# EAGLE board AutoSpielSimplified 2 (EAGLE 9.2.2)
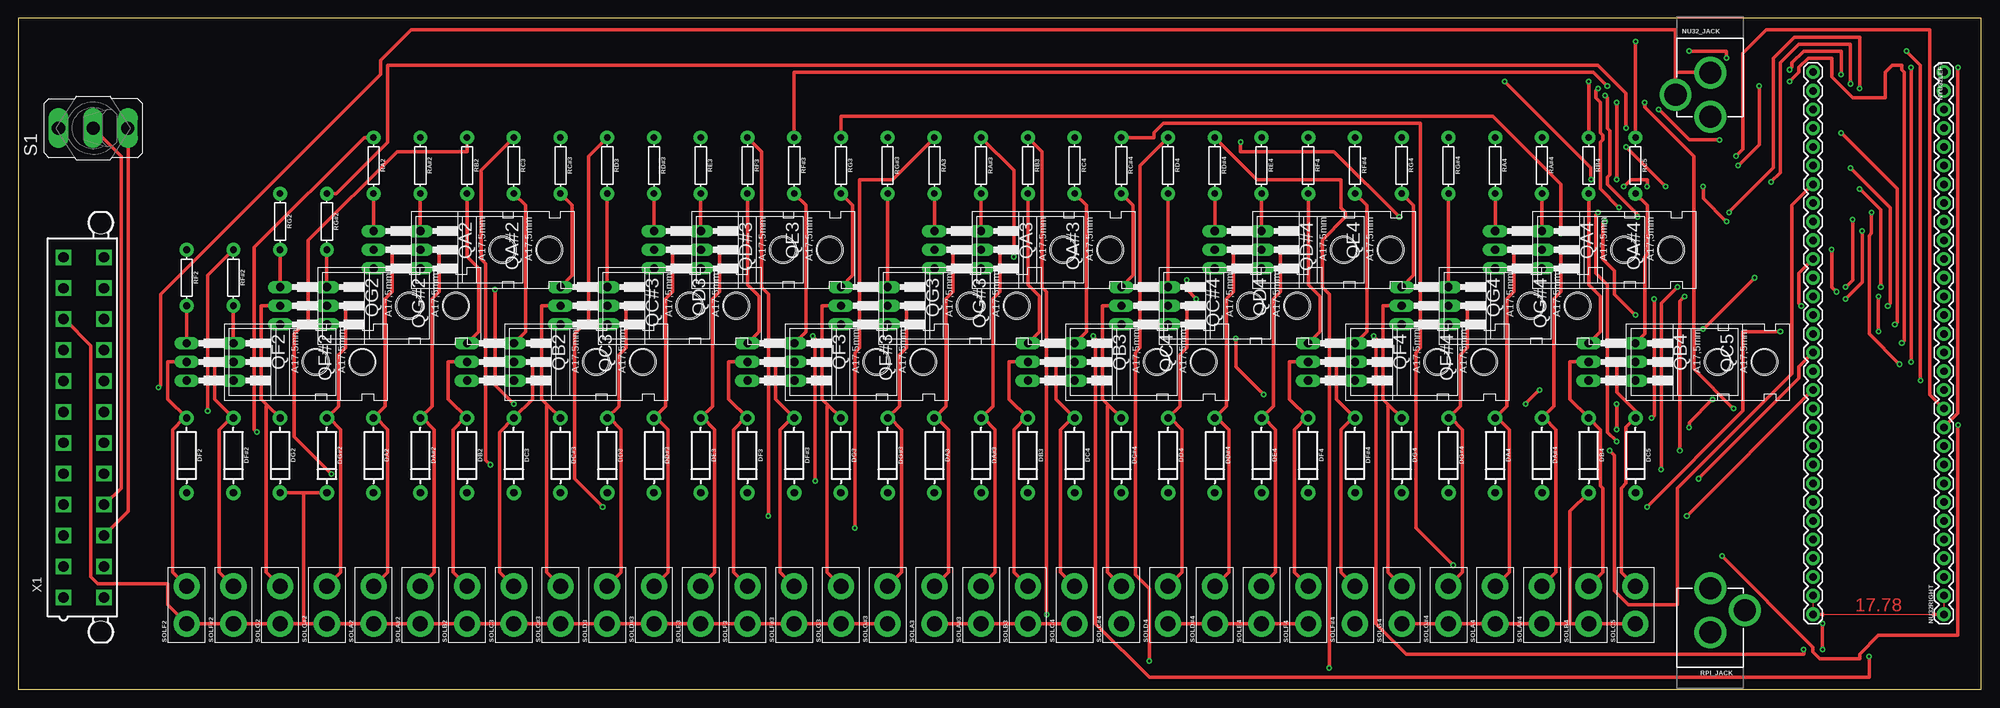
[diagram p0: board, top side]
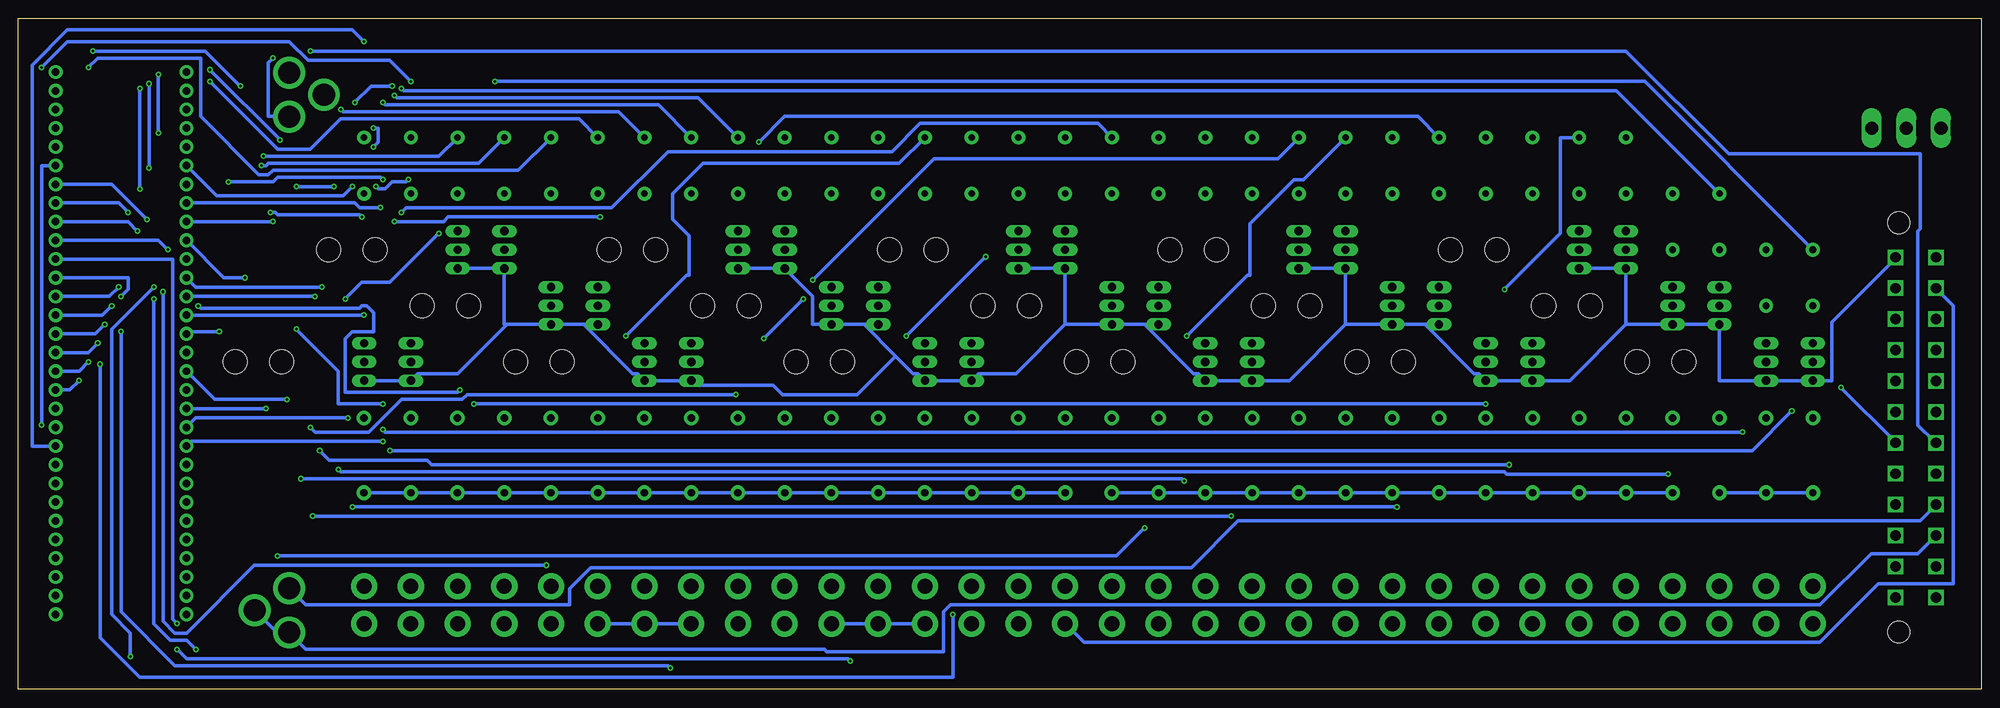
[diagram p1: board, bottom side, seen from below]

Size 266.68 x 91.11 mm. Coordinates in mm from the lower left corner, seen from the top.
Outline: 0,0 266.68,0 266.68,91.11 0,91.11 0,0
Copper layers (1*16): Top 0.035mm / dielectric 1.5mm / Bottom 0.035mm
Design rules "default *": minimum track width 20mil, minimum drill 0.35mm, track to track 16mil, track to pad 16mil, pad to pad 16mil, via to via 16mil, smd to smd 16mil, copper to edge 40mil, drill to drill 16mil, minimum pad ring 10mil, minimum via ring 8mil, stop-mask expansion 4mil, vias tented up to drill 0mil, thermal gap 10mil

## Footprints (pad centres in the part's own frame; a part is rotated, then mirrored left to right if it is on the bottom)
DIODE-1N4001 = drill 1 pad 1.981: A -5.08,0; C 5.08,0
POWER_JACK_PTH = drill 2.997 pad 4.318: GND 0,7.7; GNDBREAK 4.7,10.7; PWR 0,13.7
1X30 = drill 1.016 pad 1.88: 1 0,0; 2 2.54,0; 3 5.08,0; 4 7.62,0; 5 10.16,0; 6 12.7,0; 7 15.24,0; 8 17.78,0; 9 20.32,0; 10 22.86,0; 11 25.4,0; 12 27.94,0; 13 30.48,0; 14 33.02,0; 15 35.56,0; 16 38.1,0; 17 40.64,0; 18 43.18,0; 19 45.72,0; 20 48.26,0; 21 50.8,0; 22 53.34,0; 23 55.88,0; 24 58.42,0; 25 60.96,0; 26 63.5,0; 27 66.04,0; 28 68.58,0; 29 71.12,0; 30 73.66,0
TO220AH = drill 1.118 long: B -2.54,-6.35; C 0,-6.35; E 2.54,-6.35 | hole 3.302: 0,11.176
AXIAL-0.3 = drill 0.9 pad 1.88: P$1 -3.81,0; P$2 3.81,0
M9040P = drill 1.803 long: 1 0,4.699; 2 0,0; 3 0,-4.699
1X02_XTRA_BIG = drill 2.057 pad 3.556: 1 -2.54,0; 2 2.54,0
5566-24 = drill 1.4 square: 1 23.1,-2.75; 2 18.9,-2.75; 3 14.7,-2.75; 4 10.5,-2.75; 5 6.3,-2.75; 6 2.1,-2.75; 7 -2.1,-2.75; 8 -6.3,-2.75; 9 -10.5,-2.75; 10 -14.7,-2.75; 11 -18.9,-2.75; 12 -23.1,-2.75; 13 23.1,2.75; 14 18.9,2.75; 15 14.7,2.75; 16 10.5,2.75; 17 6.3,2.75; 18 2.1,2.75; 19 -2.1,2.75; 20 -6.3,2.75; 21 -10.5,2.75; 22 -14.7,2.75; 23 -18.9,2.75; 24 -23.1,2.75 | hole 3: 27.8,2.29; -27.8,2.29

## Placement (x,y rotation side)
DA2  1A/50V/1.1V  [DIODE-1N4001]  48.26,31.75 270 top
DA3  1A/50V/1.1V  [DIODE-1N4001]  124.46,31.75 270 top
DA4  1A/50V/1.1V  [DIODE-1N4001]  200.66,31.75 270 top
DA#2  1A/50V/1.1V  [DIODE-1N4001]  54.61,31.75 270 top
DA#3  1A/50V/1.1V  [DIODE-1N4001]  130.81,31.75 270 top
DA#4  1A/50V/1.1V  [DIODE-1N4001]  207.01,31.75 270 top
DB2  1A/50V/1.1V  [DIODE-1N4001]  60.96,31.75 270 top
DB3  1A/50V/1.1V  [DIODE-1N4001]  137.16,31.75 270 top
DB4  1A/50V/1.1V  [DIODE-1N4001]  213.36,31.75 270 top
DC3  1A/50V/1.1V  [DIODE-1N4001]  67.31,31.75 270 top
DC4  1A/50V/1.1V  [DIODE-1N4001]  143.51,31.75 270 top
DC5  1A/50V/1.1V  [DIODE-1N4001]  219.71,31.75 270 top
DC#3  1A/50V/1.1V  [DIODE-1N4001]  73.66,31.75 270 top
DC#4  1A/50V/1.1V  [DIODE-1N4001]  149.86,31.75 270 top
DD3  1A/50V/1.1V  [DIODE-1N4001]  80.01,31.75 270 top
DD4  1A/50V/1.1V  [DIODE-1N4001]  156.21,31.75 270 top
DD#3  1A/50V/1.1V  [DIODE-1N4001]  86.36,31.75 270 top
DD#4  1A/50V/1.1V  [DIODE-1N4001]  162.56,31.75 270 top
DE3  1A/50V/1.1V  [DIODE-1N4001]  92.71,31.75 270 top
DE4  1A/50V/1.1V  [DIODE-1N4001]  168.91,31.75 270 top
DF2  1A/50V/1.1V  [DIODE-1N4001]  22.86,31.75 270 top
DF3  1A/50V/1.1V  [DIODE-1N4001]  99.06,31.75 270 top
DF4  1A/50V/1.1V  [DIODE-1N4001]  175.26,31.75 270 top
DF#2  1A/50V/1.1V  [DIODE-1N4001]  29.21,31.75 270 top
DF#3  1A/50V/1.1V  [DIODE-1N4001]  105.41,31.75 270 top
DF#4  1A/50V/1.1V  [DIODE-1N4001]  181.61,31.75 270 top
DG2  1A/50V/1.1V  [DIODE-1N4001]  35.56,31.75 270 top
DG3  1A/50V/1.1V  [DIODE-1N4001]  111.76,31.75 270 top
DG4  1A/50V/1.1V  [DIODE-1N4001]  187.96,31.75 270 top
DG#2  1A/50V/1.1V  [DIODE-1N4001]  41.91,31.75 270 top
DG#3  1A/50V/1.1V  [DIODE-1N4001]  118.11,31.75 270 top
DG#4  1A/50V/1.1V  [DIODE-1N4001]  194.31,31.75 270 top
NU32_JACK  POWER_JACK  [POWER_JACK_PTH]  229.87,91.44 180 top
NU32RIGHT  [1X30]  261.62,10.16 90 top
NYU32LEFT  [1X30]  243.84,10.16 90 top
QA2  TIP120  [TO220AH]  54.61,59.69 270 top
QA3  TIP120  [TO220AH]  130.81,59.69 270 top
QA4  TIP120  [TO220AH]  207.01,59.69 270 top
QA#2  TIP120  [TO220AH]  60.96,59.69 270 top
QA#3  TIP120  [TO220AH]  137.16,59.69 270 top
QA#4  TIP120  [TO220AH]  213.36,59.69 270 top
QB2  TIP120  [TO220AH]  67.31,44.45 270 top
QB3  TIP120  [TO220AH]  143.51,44.45 270 top
QB4  TIP120  [TO220AH]  219.71,44.45 270 top
QC3  TIP120  [TO220AH]  73.66,44.45 270 top
QC4  TIP120  [TO220AH]  149.86,44.45 270 top
QC5  TIP120  [TO220AH]  226.06,44.45 270 top
QC#3  TIP120  [TO220AH]  80.01,52.07 270 top
QC#4  TIP120  [TO220AH]  156.21,52.07 270 top
QD3  TIP120  [TO220AH]  86.36,52.07 270 top
QD4  TIP120  [TO220AH]  162.56,52.07 270 top
QD#3  TIP120  [TO220AH]  92.71,59.69 270 top
QD#4  TIP120  [TO220AH]  168.91,59.69 270 top
QE3  TIP120  [TO220AH]  99.06,59.69 270 top
QE4  TIP120  [TO220AH]  175.26,59.69 270 top
QF2  TIP120  [TO220AH]  29.21,44.45 270 top
QF3  TIP120  [TO220AH]  105.41,44.45 270 top
QF4  TIP120  [TO220AH]  181.61,44.45 270 top
QF#2  TIP120  [TO220AH]  35.56,44.45 270 top
QF#3  TIP120  [TO220AH]  111.76,44.45 270 top
QF#4  TIP120  [TO220AH]  187.96,44.45 270 top
QG2  TIP120  [TO220AH]  41.91,52.07 270 top
QG3  TIP120  [TO220AH]  118.11,52.07 270 top
QG4  TIP120  [TO220AH]  194.31,52.07 270 top
QG#2  TIP120  [TO220AH]  48.26,52.07 270 top
QG#3  TIP120  [TO220AH]  124.46,52.07 270 top
QG#4  TIP120  [TO220AH]  200.66,52.07 270 top
RA2  1k  [AXIAL-0.3]  48.26,71.12 270 top
RA3  1k  [AXIAL-0.3]  124.46,71.12 270 top
RA4  1k  [AXIAL-0.3]  200.66,71.12 270 top
RA#2  1k  [AXIAL-0.3]  54.61,71.12 270 top
RA#3  1k  [AXIAL-0.3]  130.81,71.12 270 top
RA#4  1k  [AXIAL-0.3]  207.01,71.12 270 top
RB2  1k  [AXIAL-0.3]  60.96,71.12 270 top
RB3  1k  [AXIAL-0.3]  137.16,71.12 270 top
RB4  1k  [AXIAL-0.3]  213.36,71.12 270 top
RC3  1k  [AXIAL-0.3]  67.31,71.12 270 top
RC4  1k  [AXIAL-0.3]  143.51,71.12 270 top
RC5  1k  [AXIAL-0.3]  219.71,71.12 270 top
RC#3  1k  [AXIAL-0.3]  73.66,71.12 270 top
RC#4  1k  [AXIAL-0.3]  149.86,71.12 270 top
RD3  1k  [AXIAL-0.3]  80.01,71.12 270 top
RD4  1k  [AXIAL-0.3]  156.21,71.12 270 top
RD#3  1k  [AXIAL-0.3]  86.36,71.12 270 top
RD#4  1k  [AXIAL-0.3]  162.56,71.12 270 top
RE3  1k  [AXIAL-0.3]  92.71,71.12 270 top
RE4  1k  [AXIAL-0.3]  168.91,71.12 270 top
RF2  1k  [AXIAL-0.3]  22.86,55.88 270 top
RF3  1k  [AXIAL-0.3]  99.06,71.12 270 top
RF4  1k  [AXIAL-0.3]  175.26,71.12 270 top
RF#2  1k  [AXIAL-0.3]  29.21,55.88 270 top
RF#3  1k  [AXIAL-0.3]  105.41,71.12 270 top
RF#4  1k  [AXIAL-0.3]  181.61,71.12 270 top
RG2  1k  [AXIAL-0.3]  35.56,63.5 270 top
RG3  1k  [AXIAL-0.3]  111.76,71.12 270 top
RG4  1k  [AXIAL-0.3]  187.96,71.12 270 top
RG#2  1k  [AXIAL-0.3]  41.91,63.5 270 top
RG#3  1k  [AXIAL-0.3]  118.11,71.12 270 top
RG#4  1k  [AXIAL-0.3]  194.31,71.12 270 top
RPI_JACK  POWER_JACK  [POWER_JACK_PTH]  229.87,0 0 top
S1  [M9040P]  10.16,76.2 90 top
SOLA2  [1X02_XTRA_BIG]  48.26,11.43 90 top
SOLA3  [1X02_XTRA_BIG]  124.46,11.43 90 top
SOLA4  [1X02_XTRA_BIG]  200.66,11.43 90 top
SOLA#2  [1X02_XTRA_BIG]  54.61,11.43 90 top
SOLA#3  [1X02_XTRA_BIG]  130.81,11.43 90 top
SOLA#4  [1X02_XTRA_BIG]  207.01,11.43 90 top
SOLB2  [1X02_XTRA_BIG]  60.96,11.43 90 top
SOLB3  [1X02_XTRA_BIG]  137.16,11.43 90 top
SOLB4  [1X02_XTRA_BIG]  213.36,11.43 90 top
SOLC3  [1X02_XTRA_BIG]  67.31,11.43 90 top
SOLC4  [1X02_XTRA_BIG]  143.51,11.43 90 top
SOLC5  [1X02_XTRA_BIG]  219.71,11.43 90 top
SOLC#3  [1X02_XTRA_BIG]  73.66,11.43 90 top
SOLC#4  [1X02_XTRA_BIG]  149.86,11.43 90 top
SOLD3  [1X02_XTRA_BIG]  80.01,11.43 90 top
SOLD4  [1X02_XTRA_BIG]  156.21,11.43 90 top
SOLD#3  [1X02_XTRA_BIG]  86.36,11.43 90 top
SOLD#4  [1X02_XTRA_BIG]  162.56,11.43 90 top
SOLE3  [1X02_XTRA_BIG]  92.71,11.43 90 top
SOLE4  [1X02_XTRA_BIG]  168.91,11.43 90 top
SOLF2  [1X02_XTRA_BIG]  22.86,11.43 90 top
SOLF3  [1X02_XTRA_BIG]  99.06,11.43 90 top
SOLF4  [1X02_XTRA_BIG]  175.26,11.43 90 top
SOLF#2  [1X02_XTRA_BIG]  29.21,11.43 90 top
SOLF#3  [1X02_XTRA_BIG]  105.41,11.43 90 top
SOLF#4  [1X02_XTRA_BIG]  181.61,11.43 90 top
SOLG2  [1X02_XTRA_BIG]  35.56,11.43 90 top
SOLG3  [1X02_XTRA_BIG]  111.76,11.43 90 top
SOLG4  [1X02_XTRA_BIG]  187.96,11.43 90 top
SOLG#2  [1X02_XTRA_BIG]  41.91,11.43 90 top
SOLG#3  [1X02_XTRA_BIG]  118.11,11.43 90 top
SOLG#4  [1X02_XTRA_BIG]  194.31,11.43 90 top
X1  5566-24  [5566-24]  8.89,35.56 270 top

## Library data of the parts
DA2-DA4 DA#2-DA#4 DB2-DB4 DC3-DC5 DC#3 DC#4 DD3 DD4 DD#3 DD#4 DE3 DE4 DF2-DF4 DF#2-DF#4 DG2-DG4 DG#2-DG#4 = SparkFun-DiscreteSemi; PROD_ID: DIO-09176
NU32_JACK RPI_JACK = SparkFun-Connectors; PROD_ID: CONN-08197
NU32RIGHT NYU32LEFT SOLA2-SOLA4 SOLA#2-SOLA#4 SOLB2-SOLB4 SOLC3-SOLC5 SOLC#3 SOLC#4 SOLD3 SOLD4 SOLD#3 SOLD#4 SOLE3 SOLE4 SOLF2-SOLF4 SOLF#2-SOLF#4 SOLG2-SOLG4 SOLG#2-SOLG#4 = SparkFun-Connectors
QA2-QA4 QA#2-QA#4 QB2-QB4 QC3-QC5 QC#3 QC#4 QD3 QD4 QD#3 QD#4 QE3 QE4 QF2-QF4 QF#2-QF#4 QG2-QG4 QG#2-QG#4 = transistor-power
RA2-RA4 RA#2-RA#4 RB2-RB4 RC3-RC5 RC#3 RC#4 RD3 RD4 RD#3 RD#4 RE3 RE4 RF2-RF4 RF#2-RF#4 RG2-RG4 RG#2-RG#4 = SparkFun-Resistors; PROD_ID: RES-08380
S1 = switch
X1 = con-molex; MF: MOLEX; OC_FARNELL: unknown; OC_NEWARK: unknown

## Nets
A2: NYU32LEFT.21 RA2.P$1
A3: NU32RIGHT.25 RA3.P$1
A4: NU32RIGHT.13 RA4.P$1
A#2: NYU32LEFT.20 RA#2.P$1
A#3: NU32RIGHT.24 RA#3.P$1
A#4: NU32RIGHT.12 RA#4.P$1
B2: NYU32LEFT.19 RB2.P$1
B3: NU32RIGHT.23 RB3.P$1
B4: NU32RIGHT.11 RB4.P$1
C3: NYU32LEFT.18 RC3.P$1
C4: NU32RIGHT.22 RC4.P$1
C5: NU32RIGHT.10 RC5.P$1
C#3: NYU32LEFT.17 RC#3.P$1
C#4: NU32RIGHT.21 RC#4.P$1
D3: NYU32LEFT.16 RD3.P$1
D4: NU32RIGHT.20 RD4.P$1
D#3: NYU32LEFT.15 RD#3.P$1
D#4: NU32RIGHT.19 RD#4.P$1
E3: NYU32LEFT.14 RE3.P$1
E4: NU32RIGHT.18 RE4.P$1
F2: NYU32LEFT.25 RF2.P$1
F3: NYU32LEFT.13 RF3.P$1
F4: NU32RIGHT.17 RF4.P$1
F#2: NYU32LEFT.24 RF#2.P$1
F#3: NYU32LEFT.12 RF#3.P$1
F#4: NU32RIGHT.16 RF#4.P$1
G2: NYU32LEFT.23 RG2.P$1
G3: NYU32LEFT.11 RG3.P$1
G4: NU32RIGHT.15 RG4.P$1
G#2: NYU32LEFT.22 RG#2.P$1
G#3: NYU32LEFT.10 RG#3.P$1
G#4: NU32RIGHT.14 RG#4.P$1
GND: QA2.E QA3.E QA4.E QA#2.E QA#3.E QA#4.E QB2.E QB3.E QB4.E QC3.E QC4.E QC5.E QC#3.E QC#4.E QD3.E QD4.E QD#3.E QD#4.E QE3.E QE4.E QF2.E QF3.E QF4.E QF#2.E QF#3.E QF#4.E QG2.E QG3.E QG4.E QG#2.E QG#3.E QG#4.E X1.24
N$1: QF2.B RF2.P$2
N$2: QC#3.B RC#3.P$2
N$3: DF2.A QF2.C SOLF2.2
N$4: QF#2.B RF#2.P$2
N$5: DF#2.A QF#2.C SOLF#2.2
N$6: DC#3.A QC#3.C SOLC#3.2
N$7: QG2.B RG2.P$2
N$8: DG2.A QG2.C SOLG2.2
N$9: QD3.B RD3.P$2
N$10: QG#2.B RG#2.P$2
N$11: DG#2.A QG#2.C SOLG#2.2
N$12: DD3.A QD3.C SOLD3.2
N$13: QA2.B RA2.P$2
N$14: DA2.A QA2.C SOLA2.2
N$15: QD#3.B RD#3.P$2
N$16: QA#2.B RA#2.P$2
N$17: DA#2.A QA#2.C SOLA#2.2
N$18: DD#3.A QD#3.C SOLD#3.2
N$19: QB2.B RB2.P$2
N$20: DB2.A QB2.C SOLB2.2
N$21: QE3.B RE3.P$2
N$22: QC3.B RC3.P$2
N$23: DC3.A QC3.C SOLC3.2
N$24: DE3.A QE3.C SOLE3.2
N$25: QA3.B RA3.P$2
N$26: DA3.A QA3.C SOLA3.2
N$27: QF3.B RF3.P$2
N$28: DF3.A QF3.C SOLF3.2
N$29: QF#3.B RF#3.P$2
N$30: DF#3.A QF#3.C SOLF#3.2
N$31: QG3.B RG3.P$2
N$32: DG3.A QG3.C SOLG3.2
N$33: QG#3.B RG#3.P$2
N$34: DG#3.A QG#3.C SOLG#3.2
N$35: QF4.B RF4.P$2
N$36: DF4.A QF4.C SOLF4.2
N$37: QF#4.B RF#4.P$2
N$38: DF#4.A QF#4.C SOLF#4.2
N$39: QG4.B RG4.P$2
N$40: DG4.A QG4.C SOLG4.2
N$41: QG#4.B RG#4.P$2
N$42: DG#4.A QG#4.C SOLG#4.2
N$43: QA4.B RA4.P$2
N$44: DA4.A QA4.C SOLA4.2
N$45: QA#4.B RA#4.P$2
N$46: DA#4.A QA#4.C SOLA#4.2
N$47: QB4.B RB4.P$2
N$48: DB4.A QB4.C SOLB4.2
N$49: QC5.B RC5.P$2
N$50: DC5.A QC5.C SOLC5.2
N$52: QA#3.B RA#3.P$2
N$53: DA#3.A QA#3.C SOLA#3.2
N$55: QB3.B RB3.P$2
N$56: DB3.A QB3.C SOLB3.2
N$57: S1.1
N$58: QC4.B RC4.P$2
N$59: DC4.A QC4.C SOLC4.2
N$61: QC#4.B RC#4.P$2
N$62: DC#4.A QC#4.C SOLC#4.2
N$64: QD4.B RD4.P$2
N$65: DD4.A QD4.C SOLD4.2
N$67: QD#4.B RD#4.P$2
N$68: DD#4.A QD#4.C SOLD#4.2
N$70: QE4.B RE4.P$2
N$71: DE4.A QE4.C SOLE4.2
NU32GND: NU32_JACK.GND NU32_JACK.GNDBREAK X1.18
NU32PWR: NU32_JACK.PWR X1.6
PS_ON: S1.2 X1.16
PS_ONGND: S1.3 X1.15
RPI_GND: RPI_JACK.GND RPI_JACK.GNDBREAK X1.3
RPI_PWR: RPI_JACK.PWR X1.4
VDD1: DA2.C DA#2.C DB2.C DC3.C DC#3.C DD3.C DD#3.C DE3.C DF2.C DF3.C DF#2.C DF#3.C DG2.C DG3.C DG#2.C DG#3.C SOLA2.1 SOLA#2.1 SOLB2.1 SOLC3.1 SOLC#3.1 SOLD3.1 SOLD#3.1 SOLE3.1 SOLF2.1 SOLF3.1 SOLF#2.1 SOLF#3.1 SOLG2.1 SOLG3.1 SOLG#2.1 SOLG#3.1 X1.10
VDD2: DA3.C DA4.C DA#3.C DA#4.C DB3.C DB4.C DC4.C DC5.C DC#4.C DD4.C DD#4.C DE4.C DF4.C DF#4.C DG4.C DG#4.C SOLA3.1 SOLA4.1 SOLA#3.1 SOLA#4.1 SOLB3.1 SOLB4.1 SOLC4.1 SOLC5.1 SOLC#4.1 SOLD4.1 SOLD#4.1 SOLE4.1 SOLF4.1 SOLF#4.1 SOLG4.1 SOLG#4.1 X1.11

## Tracks (layer width: path | path; a pad name or v marks a point on that pad's centre or on a via)
A2  (via drill 0.35)
  Top 0.508: v228.92,48.9 v235.9,55.88 | v217.17,35.24 v217.17,38.73 | v32.38,34.93 32.07,35.24 32.07,60.01 46.99,74.93 RA2.P$1
  Bottom 0.508: NYU32LEFT.21 238.76,55.88 v235.9,55.88 | v228.92,48.9 223.2,43.18 223.2,38.73 v217.17,38.73 | v217.17,35.24 216.85,34.93 v32.38,34.93
A3  (via drill 0.35)
  Top 0.508: RA3.P$1 118.75,69.22 114.3,69.22 114.3,46.35 113.67,45.72 v113.67,21.91 | v231.46,18.1 243.84,5.71 243.84,5.08 244.79,4.13 250.19,4.13 250.19,4.76 252.73,7.3 263.52,7.3 v263.52,35.88
  Bottom 0.508: v113.67,21.91 117.47,18.1 v231.46,18.1 | v263.52,35.88 263.52,71.12 NU32RIGHT.25
A4  (via drill 0.35)
  Top 0.508: v233.68,71.12 236.54,73.98 v236.54,81.91 | v256.54,86.68 258.44,84.77 v258.44,41.91
  Bottom 0.508: RA4.P$1 204.15,71.44 232.73,71.44 233.04,71.12 v233.68,71.12 | v236.54,81.91 241.3,86.68 v256.54,86.68 | v258.44,41.91 259.71,40.64 NU32RIGHT.13
A#2  (via drill 0.35)
  Top 0.508: NYU32LEFT.20 241.94,56.51 241.94,52.39 v242.25,52.07 | v204.79,38.73 v206.69,40.64 | v67.31,38.73 64.77,41.27 v64.77,54.29
  Bottom 0.508: v242.25,52.07 241.94,51.75 220.34,51.75 220.03,52.07 219.39,52.07 218.44,51.12 218.44,48.58 221.3,48.58 222.25,47.62 222.25,40.32 207.01,40.32 v206.69,40.64 | v67.31,38.73 v204.79,38.73 | v64.77,54.29 57.15,61.91 57.15,74.93 RA#2.P$1
A#3  (via drill 0.35)
  Top 0.508: RA#3.P$1 135.25,70.48 v135.25,58.74 | v146.05,47.94 146.37,47.62 146.37,8.89 153.67,1.59 251.46,1.59 v251.46,4.45 | v248.28,54.61 249.24,55.56 v249.24,63.82
  Bottom 0.508: v146.05,47.94 v135.25,58.74 | v251.46,4.45 251.46,7.62 254,10.16 254,48.9 v248.28,54.61 | v249.24,63.82 254,68.58 NU32RIGHT.24
A#4  (via drill 0.35)
  Top 0.508: v233.36,72.39 234.31,73.34 234.31,86.36 237.49,89.53 259.71,89.53 259.71,40.01 NU32RIGHT.12
  Bottom 0.508: RA#4.P$1 209.55,72.39 v233.36,72.39
B2  (via drill 0.35)
  Top 0.508: v225.43,54.61 223.2,52.39 v223.2,29.85 | v42.55,29.21 37.47,34.29 37.47,48.26 39.37,50.16 39.37,60.96 51.44,73.03 60.96,73.03 RB2.P$1
  Bottom 0.508: NYU32LEFT.19 242.57,54.61 v225.43,54.61 | v223.2,29.85 222.88,29.53 64.77,29.53 64.45,29.21 v42.55,29.21
B3  (via drill 0.35)
  Top 0.508: RB3.P$1 139.06,73.03 139.06,54.61 139.7,53.98 v139.7,10.16 | v255.59,44.13 251.46,48.26 251.46,61.6 251.78,61.91 v251.78,64.77
  Bottom 0.508: v139.7,10.16 139.7,1.59 250.19,1.59 255.59,6.98 v255.59,44.13 | v251.78,64.77 253.05,66.04 NU32RIGHT.23
B4  (via drill 0.35)
  Top 0.508: v213.36,82.55 RB4.P$1 | v263.52,84.45 263.52,37.46 NU32RIGHT.11
  Bottom 0.508: v213.36,82.55 216.22,85.41 227.33,85.41 229.87,87.95 260.03,87.95 v263.52,84.45
C3  (via drill 0.35)
  Top 0.508: v226.38,53.34 225.74,52.71 v225.74,32.38 | v64.14,30.48 63.5,31.12 63.5,57.79 62.87,58.42 62.87,70.48 RC3.P$1
  Bottom 0.508: v226.38,53.34 NYU32LEFT.18 | v225.74,32.38 224.47,31.12 211.14,31.12 210.5,30.48 v64.14,30.48
C4  (via drill 0.35)
  Top 0.508: v184.15,47.94 184.47,47.62 184.47,8.89 188.59,4.76 242.57,4.76 v242.57,5.4 | v248.28,53.02 250.51,55.24 v250.51,62.23
  Bottom 0.508: RC4.P$1 147,71.44 173.67,71.44 177.8,67.31 177.8,63.82 175.58,61.6 175.58,56.2 175.9,56.2 v184.15,47.94 | v242.57,5.4 243.84,6.67 246.06,6.67 248.28,8.89 v248.28,53.02 | v250.51,62.23 251.78,63.5 NU32RIGHT.22
C5  (via drill 0.35)
  Top 0.508: v219.71,87.95 RC5.P$1
  Bottom 0.508: v219.71,87.95 221.3,89.53 260.03,89.53 264.8,84.77 264.8,33.02 NU32RIGHT.10
C#3  (via drill 0.35)
  Top 0.508: v219.71,50.8 216.85,53.66 216.85,56.83 215.26,58.42 215.26,63.18 v215.58,63.5 | v187.64,64.13 178.75,73.03 166.05,73.03 v166.05,74.29
  Bottom 0.508: v219.71,50.8 NYU32LEFT.17 | v215.58,63.5 208.91,63.5 208.28,64.13 v187.64,64.13 | v166.05,74.29 162.56,77.79 76.52,77.79 RC#3.P$1
C#4  (via drill 0.35)
  Top 0.508: RC#4.P$1 154.31,74.93 154.31,75.56 155.57,76.83 190.5,76.83 190.5,46.35 189.87,45.72 189.87,21.91 v194.94,16.83 | v247.01,53.98 246.38,54.61 v246.38,59.69
  Bottom 0.508: v194.94,16.83 234.63,16.83 243.84,7.62 245.43,7.62 247.01,9.21 v247.01,53.98 | v246.38,59.69 247.65,60.96 NU32RIGHT.21
D3  (via drill 0.35)
  Top 0.508: v239.4,48.58 234.31,48.58 234.31,37.78 v221.3,24.76 | v79.38,24.76 75.56,28.57 75.56,48.26 77.47,50.16 77.47,72.39 RD3.P$1
  Bottom 0.508: NYU32LEFT.16 243.52,48.58 v239.4,48.58 | v79.38,24.76 v221.3,24.76
D4  (via drill 0.35)
  Top 0.508: RD4.P$1 152.4,71.12 152.4,46.35 151.76,45.72 151.76,15.56 153.67,13.65 v153.67,3.81 | v245.11,8.89 v245.11,5.4
  Bottom 0.508: v153.67,3.81 153.99,4.13 243.84,4.13 v245.11,5.4 | v245.11,8.89 245.75,9.52 245.75,58.42 NU32RIGHT.20
D#3  (via drill 0.35)
  Top 0.508: v107.95,47.94 108.27,47.62 v108.27,28.26 | v228.28,28.57 241.94,42.23 241.94,43.82 NYU32LEFT.15
  Bottom 0.508: RD#3.P$1 92.08,69.22 93.34,69.22 99.38,63.18 99.38,56.2 99.69,56.2 v107.95,47.94 | v108.27,28.26 108.58,28.57 v228.28,28.57
D#4  (via drill 0.35)
  Top 0.508: RD#4.P$1 168.28,69.22 179.71,69.22 179.71,65.41 180.34,64.77 180.34,64.13 177.16,60.96 177.16,54.61 178.12,53.66 v178.12,2.86 | v252.73,53.34 v252.73,48.58
  Bottom 0.508: v178.12,2.86 178.44,3.18 245.43,3.18 252.73,10.48 v252.73,48.58 | v252.73,53.34 251.78,54.29 251.78,55.88 NU32RIGHT.19
E3  (via drill 0.35)
  Top 0.508: v230.19,39.37 227.01,36.2 v227.01,35.56 | v169.23,40.01 165.42,43.82 v165.42,47.62 | v160.02,53.02 158.75,54.29 v158.75,55.56
  Bottom 0.508: NYU32LEFT.14 240.03,39.37 v230.19,39.37 | v227.01,35.56 226.38,34.93 219.07,34.93 214.63,39.37 206.38,39.37 205.74,40.01 v169.23,40.01 | v160.02,53.02 v165.42,47.62 | v158.75,55.56 142.24,72.07 95.57,72.07 RE3.P$1
E4  (via drill 0.35)
  Top 0.508: v215.58,80.64 215.9,80.33 215.9,76.2 216.22,75.88 216.22,69.85 215.9,69.53 215.9,68.58 220.03,64.45 v220.03,64.13 | v232.41,64.77 238.44,70.8 238.44,85.72 241.3,88.58 250.19,88.58 v250.19,81.6 | v250.19,67.94 253.05,65.09 v253.05,54.61
  Bottom 0.508: RE4.P$1 174.31,80.33 215.26,80.33 v215.58,80.64 | v220.03,64.13 220.34,64.45 231.46,64.45 231.78,64.77 v232.41,64.77 | v250.19,67.94 v250.19,81.6 | v253.05,54.61 254.32,53.34 NU32RIGHT.18
F2  (via drill 0.35)
  Top 0.508: v201.93,82.55 213.68,70.8 v213.68,69.22 | v218.12,68.26 219.07,69.22 221.3,69.22 v221.3,68.26
  Bottom 0.508: RF2.P$1 45.72,82.55 v201.93,82.55 | v213.68,69.22 214,68.9 215.9,68.9 216.85,67.94 217.81,67.94 v218.12,68.26 | v221.3,68.26 222.57,66.99 239.71,66.99 NYU32LEFT.25
F3  (via drill 0.35)
  Top 0.508: RF3.P$1 100.97,73.03 100.97,54.61 101.92,53.66 v101.92,23.49 | NYU32LEFT.13 v226.69,23.49
  Bottom 0.508: v226.69,23.49 v101.92,23.49
F4  (via drill 0.35)
  Top 0.508: v217.17,69.22 v217.17,79.69 | v238.12,68.9 239.4,70.17 239.4,85.09 241.94,87.63 248.92,87.63 v248.92,82.23 | v248.92,70.8 254.32,65.41 254.32,52.39 v254,52.07
  Bottom 0.508: RF4.P$1 179.71,79.38 216.85,79.38 v217.17,79.69 | v217.17,69.22 217.49,69.53 231.46,69.53 232.09,68.9 v238.12,68.9 | v248.92,70.8 v248.92,82.23 | v254,52.07 255.27,50.8 NU32RIGHT.17
F#2  (via drill 0.35)
  Top 0.508: RF#2.P$1 25.72,56.2 v25.72,37.78 | v216.22,32.38 216.85,31.75 216.85,13.34 218.76,11.43 225.43,11.43 225.43,27.3 240.98,42.86 240.98,65.72 NYU32LEFT.24
  Bottom 0.508: v25.72,37.78 31.11,32.38 v216.22,32.38
F#3  (via drill 0.35)
  Top 0.508: v233.04,38.1 227.65,43.5 227.65,72.39 220.98,79.06 v220.98,79.69 | v215.9,81.91 214,83.82 105.41,83.82 RF#3.P$1
  Bottom 0.508: v233.04,38.1 NYU32LEFT.12 | v220.98,79.69 218.76,81.91 v215.9,81.91
F#4  (via drill 0.35)
  Top 0.508: v222.88,78.74 227.01,74.61 v231.14,74.61 | v240.66,84.14 240.98,84.45 240.98,85.09 242.57,86.68 247.65,86.68 v247.65,83.5 | v247.65,75.56 255.27,67.94 255.27,49.85 v254.95,49.53
  Bottom 0.508: RF#4.P$1 185.1,78.42 222.57,78.42 v222.88,78.74 | v240.66,84.14 v231.14,74.61 | v247.65,75.56 v247.65,83.5 | v254.95,49.53 256.22,48.26 NU32RIGHT.16
G2  (via drill 0.35)
  Top 0.508: v217.49,65.41 214.95,67.94 214.95,74.29 215.26,74.61 215.26,75.25 214.95,75.56 214.95,79.69 214.31,80.33 214.31,81.28 v214.63,81.6
  Bottom 0.508: NYU32LEFT.23 220.98,66.04 220.34,65.41 v217.49,65.41 | v214.63,81.6 214.31,81.28 49.53,81.28 RG2.P$1
G3  (via drill 0.35)
  Top 0.508: v221.93,36.83 222.25,37.15 v222.25,53.02 | v209.55,61.91 209.55,68.58 200.34,77.79 111.76,77.79 RG3.P$1
  Bottom 0.508: NYU32LEFT.11 242.57,36.83 v221.93,36.83 | v222.25,53.02 220.03,55.24 216.22,55.24 v209.55,61.91
G4  (via drill 0.35)
  Top 0.508: v240.66,82.55 241.94,83.82 241.94,84.45 243.21,85.72 246.38,85.72 246.38,83.19 249.24,80.33 253.68,80.33 253.68,83.82 254.63,84.77 255.91,84.77 255.91,84.14 256.22,83.82 256.22,47.31 v255.91,46.99
  Bottom 0.508: RG4.P$1 190.5,77.47 222.88,77.47 227.01,73.34 231.46,73.34 v240.66,82.55 | v255.91,46.99 257.18,45.72 NU32RIGHT.15
G#2  (via drill 0.35)
  Top 0.508: v232.09,63.5 228.92,66.68 v228.92,68.26 | v218.44,73.66 v223.84,68.26 | v218.44,76.2 218.44,80.96 214.63,84.77 50.16,84.77 50.16,74.29 43.18,67.31 RG#2.P$1
  Bottom 0.508: v232.09,63.5 NYU32LEFT.22 | v223.84,68.26 v228.92,68.26 | v218.44,73.66 217.81,74.29 217.81,76.2 v218.44,76.2
G#3  (via drill 0.35)
  Top 0.508: v217.17,33.65 215.9,34.93 215.9,54.93 214.31,56.51 214.31,64.45 v214.63,64.77
  Bottom 0.508: NYU32LEFT.10 243.21,33.65 v217.17,33.65 | v214.63,64.77 214,65.41 186.06,65.41 178.44,73.03 147.96,73.03 144.15,76.83 120.02,76.83 RG#3.P$1
G#4  (via drill 0.35)
  Top 0.508: v257.18,44.45 v257.18,84.45
  Bottom 0.508: RG#4.P$1 198.75,70.48 232.09,70.48 232.73,69.85 234,69.85 241.94,77.79 241.94,85.72 255.91,85.72 v257.18,84.45 | v257.18,44.45 258.44,43.18 NU32RIGHT.14
GND
  Bottom 0.508: QA#2.E QA2.E 48.26,49.53 | X1.24 11.75,58.42 20.32,49.85 20.32,41.91 QF2.E QF#2.E 35.56,41.91 QG2.E QG#2.E 48.26,49.53 | QA#4.E QA4.E 200.66,49.53 200.5,49.37 | QC5.E QB4.E 212.41,42.86 207.01,42.86 200.5,49.37 | 189.87,49.53 QG#4.E 200.34,49.53 200.5,49.37 | 189.87,49.53 QG4.E | 189.87,49.53 183.2,42.86 182.56,42.86 QF#4.E QF4.E 174.62,41.27 164.15,41.27 162.88,40.01 152.72,40.01 147.48,45.24 | QE4.E QD#4.E 158.75,53.34 158.75,49.53 QD4.E 151.76,49.53 | 151.76,49.53 QC#4.E | 151.76,49.53 147.48,45.24 | 147.48,45.24 145.1,42.86 144.46,42.86 QC4.E QB3.E 136.21,42.86 131.13,42.86 124.46,49.53 | QE3.E QD#3.E 86.36,49.53 | 75.56,49.53 QD3.E 86.36,49.53 | 75.56,49.53 QC#3.E | 75.56,49.53 68.9,42.86 68.26,42.86 QC3.E QB2.E 55.88,41.91 48.26,49.53 | QA#3.E QA3.E 124.46,49.53 | 113.67,49.53 QG#3.E 124.46,49.53 | 113.67,49.53 QG3.E | 113.67,49.53 107,42.86 106.36,42.86 QF#3.E QF3.E 93.98,41.91 86.36,49.53
N$1
  Top 0.508: RF2.P$2 QF2.B
N$2
  Top 0.508: QC#3.B 75.25,56.2 75.25,65.72 RC#3.P$2
N$3
  Top 0.508: QF2.C 20.32,44.45 20.32,39.37 DF2.A 22.54,36.83 20.95,35.24 20.95,15.87 SOLF2.2
N$4
  Top 0.508: RF#2.P$2 QF#2.B
N$5
  Top 0.508: QF#2.C 26.67,44.45 26.67,39.37 DF#2.A 28.89,36.83 27.3,35.24 27.3,15.87 SOLF#2.2
N$6
  Top 0.508: QC#3.C 71.12,52.07 71.12,39.37 71.91,38.58 | DC#3.A 71.91,38.58 | SOLC#3.2 71.75,15.87 71.75,38.42 71.91,38.58
N$7
  Top 0.508: RG2.P$2 QG2.B
N$8
  Top 0.508: QG2.C 33.02,52.07 33.02,39.37 33.81,38.58 | DG2.A 33.81,38.58 | SOLG2.2 33.66,15.87 33.66,38.42 33.81,38.58
N$9
  Top 0.508: RD3.P$2 QD3.B
N$10
  Top 0.508: RG#2.P$2 QG#2.B
N$11
  Top 0.508: QG#2.C 44.45,52.07 44.45,46.35 43.5,45.4 43.5,38.42 DG#2.A 42.23,36.83 43.81,35.24 43.81,15.87 SOLG#2.2
N$12
  Top 0.508: QD3.C 82.55,52.07 82.55,46.35 81.6,45.4 81.6,38.42 DD3.A 80.33,36.83 81.92,35.24 81.92,15.87 SOLD3.2
N$13
  Top 0.508: RA2.P$2 QA2.B
N$14
  Top 0.508: QA2.C 50.8,59.69 50.8,53.98 49.85,53.02 49.85,38.42 DA2.A 48.58,36.83 50.16,35.24 50.16,15.87 SOLA2.2
N$15
  Top 0.508: RD#3.P$2 QD#3.B
N$16
  Top 0.508: RA#2.P$2 QA#2.B
N$17
  Top 0.508: QA#2.C 57.15,59.69 57.15,53.98 56.2,53.02 56.2,38.42 DA#2.A 54.93,36.83 56.52,35.24 56.52,15.87 SOLA#2.2
N$18
  Top 0.508: QD#3.C 88.9,59.69 88.9,53.98 87.95,53.02 87.95,38.42 DD#3.A 86.68,36.83 88.27,35.24 88.27,15.87 SOLD#3.2
N$19
  Top 0.508: QB2.B 62.55,48.58 62.55,57.15 60.96,58.74 RB2.P$2
N$20
  Top 0.508: QB2.C 58.42,44.45 58.42,39.37 DB2.A 60.64,36.83 59.05,35.24 59.05,15.87 SOLB2.2
N$21
  Top 0.508: RE3.P$2 QE3.B
N$22
  Top 0.508: QC3.B 68.9,48.58 68.9,65.72 RC3.P$2
N$23
  Top 0.508: QC3.C 69.85,44.45 69.85,39.37 DC3.A 65.41,34.93 65.41,15.87 SOLC3.2
N$24
  Top 0.508: QE3.C 95.25,59.69 95.25,53.98 94.3,53.02 94.3,38.42 DE3.A 93.03,36.83 94.61,35.24 94.61,15.87 SOLE3.2
N$25
  Top 0.508: RA3.P$2 QA3.B
N$26
  Top 0.508: QA3.C 127,59.69 127,53.98 126.05,53.02 126.05,38.42 DA3.A 124.78,36.83 126.36,35.24 126.36,15.87 SOLA3.2
N$27
  Top 0.508: QF3.B 100.65,48.58 100.65,53.34 99.06,54.93 RF3.P$2
N$28
  Top 0.508: QF3.C 96.52,44.45 96.52,39.37 DF3.A 98.74,36.83 97.16,35.24 97.16,15.87 SOLF3.2
N$29
  Top 0.508: QF#3.B 107,48.58 107,65.72 RF#3.P$2
N$30
  Top 0.508: QF#3.C 102.87,44.45 102.87,39.37 DF#3.A 105.09,36.83 103.5,35.24 103.5,15.87 SOLF#3.2
N$31
  Top 0.508: QG3.B 113.35,56.2 113.35,65.72 RG3.P$2
N$32
  Top 0.508: QG3.C 109.22,52.07 109.22,39.37 110.01,38.58 | DG3.A 110.01,38.58 | SOLG3.2 109.86,15.87 109.86,38.42 110.01,38.58
N$33
  Top 0.508: RG#3.P$2 QG#3.B
N$34
  Top 0.508: QG#3.C 120.65,52.07 120.65,46.35 119.7,45.4 119.7,38.42 DG#3.A 118.43,36.83 120.02,35.24 120.02,15.87 SOLG#3.2
N$35
  Top 0.508: QF4.B 176.85,48.58 176.85,53.34 175.26,54.93 RF4.P$2
N$36
  Top 0.508: QF4.C 172.72,44.45 172.72,39.37 DF4.A 174.94,36.83 173.35,35.24 173.35,15.87 SOLF4.2
N$37
  Top 0.508: QF#4.B 183.2,48.58 183.2,65.72 RF#4.P$2
N$38
  Top 0.508: QF#4.C 179.07,44.45 179.07,39.37 DF#4.A 181.29,36.83 179.71,35.24 179.71,15.87 SOLF#4.2
N$39
  Top 0.508: QG4.B 189.55,56.2 189.55,65.72 RG4.P$2
N$40
  Top 0.508: QG4.C 185.42,52.07 185.42,39.37 186.21,38.58 | DG4.A 186.21,38.58 | SOLG4.2 186.06,15.87 186.06,38.42 186.21,38.58
N$41
  Top 0.508: RG#4.P$2 QG#4.B
N$42
  Top 0.508: QG#4.C 196.85,52.07 196.85,46.35 195.9,45.4 195.9,38.42 DG#4.A 194.63,36.83 196.22,35.24 196.22,15.87 SOLG#4.2
N$43
  Top 0.508: RA4.P$2 QA4.B
N$44
  Top 0.508: QA4.C 203.2,59.69 203.2,53.98 202.25,53.02 202.25,38.42 DA4.A 200.98,36.83 202.56,35.24 202.56,15.87 SOLA4.2
N$45
  Top 0.508: RA#4.P$2 QA#4.B
N$46
  Top 0.508: QA#4.C 209.55,59.69 209.55,53.98 208.6,53.02 208.6,38.42 DA#4.A 207.33,36.83 208.91,35.24 208.91,15.87 SOLA#4.2
N$47
  Top 0.508: QB4.B 214.95,48.58 214.95,53.34 213.36,54.93 RB4.P$2
N$48
  Top 0.508: QB4.C 210.82,44.45 210.82,39.37 DB4.A 214.95,35.24 214.95,27.62 215.26,27.3 215.26,15.87 SOLB4.2
N$49
  Top 0.508: QC5.B 220.98,48.26 220.98,58.74 221.3,59.05 221.3,65.72 RC5.P$2
N$50
  Top 0.508: QC5.C 217.17,44.45 217.17,40.32 219.71,37.78 DC5.A 218.44,35.56 218.44,27.94 217.81,27.3 217.81,15.87 SOLC5.2
N$52
  Top 0.508: RA#3.P$2 QA#3.B
N$53
  Top 0.508: QA#3.C 133.35,59.69 133.35,53.98 132.4,53.02 132.4,38.42 DA#3.A 131.13,36.83 132.72,35.24 132.72,15.87 SOLA#3.2
N$55
  Top 0.508: QB3.B 138.75,48.58 138.75,53.34 137.16,54.93 RB3.P$2
N$56
  Top 0.508: QB3.C 134.62,44.45 134.62,39.37 DB3.A 136.84,36.83 135.25,35.24 135.25,15.87 SOLB3.2
N$58
  Top 0.508: QC4.B 145.1,48.58 145.1,65.72 RC4.P$2
N$59
  Top 0.508: QC4.C 140.97,44.45 140.97,39.37 DC4.A 143.19,36.83 141.6,35.24 141.6,15.87 SOLC4.2
N$61
  Top 0.508: QC#4.B 151.45,56.2 151.45,65.72 RC#4.P$2
N$62
  Top 0.508: QC#4.C 147.32,52.07 147.32,39.37 148.11,38.58 | DC#4.A 148.11,38.58 | SOLC#4.2 147.96,15.87 147.96,38.42 148.11,38.58
N$64
  Top 0.508: RD4.P$2 QD4.B
N$65
  Top 0.508: QD4.C 158.75,52.07 158.75,46.35 157.8,45.4 157.8,38.42 DD4.A 156.53,36.83 158.12,35.24 158.12,15.87 SOLD4.2
N$67
  Top 0.508: RD#4.P$2 QD#4.B
N$68
  Top 0.508: QD#4.C 165.1,59.69 165.1,53.98 164.15,53.02 164.15,38.42 DD#4.A 162.88,36.83 164.47,35.24 164.47,15.87 SOLD#4.2
N$70
  Top 0.508: RE4.P$2 QE4.B
N$71
  Top 0.508: QE4.C 171.45,59.69 171.45,53.98 170.5,53.02 170.5,38.42 DE4.A 169.23,36.83 170.81,35.24 170.81,15.87 SOLE4.2
NU32GND  (via drill 0.35)
  Top 0.508: v19.05,40.96 19.37,41.27 19.37,53.66 49.21,83.5 49.21,85.41 53.34,89.53 225.11,89.53 225.11,83.82 | 225.11,83.82 225.11,80.96 NU32_JACK.GNDBREAK | 225.11,83.82 229.87,83.82 NU32_JACK.GND
  Bottom 0.508: v19.05,40.96 11.75,33.65 X1.18
NU32PWR  (via drill 0.35)
  Top 0.508: v227.01,86.68 232.09,86.68 v232.09,85.72
  Bottom 0.508: v227.01,86.68 48.26,86.68 34.29,72.71 8.26,72.71 8.26,62.55 8.57,62.23 8.57,35.88 6.35,33.65 X1.6 | v232.09,85.72 232.73,85.09 232.73,77.79 229.87,77.79 NU32_JACK.PWR
PS_ON
  Top 0.508: S1.2 13.97,72.39 13.97,27.3 11.75,25.08 X1.16
PS_ONGND
  Top 0.508: X1.15 11.75,20.96 14.92,24.13 14.92,76.2 S1.3
RPI_GND
  Bottom 0.508: X1.3 6.35,20.64 8.57,18.41 14.92,18.41 21.91,11.43 140.02,11.43 140.97,10.48 140.97,5.08 156.84,5.08 157.16,5.4 227.65,5.4 229.87,7.62 RPI_JACK.GND 229.87,7.94 231.78,7.94 234.31,10.48 RPI_JACK.GNDBREAK
RPI_PWR
  Bottom 0.508: X1.4 6.35,24.76 8.26,22.86 100.97,22.86 107.31,16.51 188.91,16.51 191.77,13.65 191.77,11.43 227.65,11.43 229.87,13.65 RPI_JACK.PWR
VDD1
  Top 0.508: DG#2.C 38.73,26.67 | 38.73,26.67 DG2.C | X1.10 6.35,50.16 9.84,46.67 9.84,15.24 10.79,14.29 20.32,14.29 20.32,11.43 SOLF2.1 SOLF#2.1 SOLG2.1 38.73,8.89 | 38.73,8.89 SOLG#2.1 SOLA2.1 SOLA#2.1 SOLB2.1 SOLC3.1 SOLC#3.1 SOLD3.1 SOLD#3.1 SOLE3.1 SOLF3.1 SOLF#3.1 SOLG3.1 SOLG#3.1 | 38.73,8.89 38.73,26.67
  Bottom 0.508: DF2.C DF#2.C DG2.C | DG#2.C DA2.C DA#2.C DB2.C DC3.C DC#3.C DD3.C DD#3.C DE3.C DF3.C DF#3.C DG3.C DG#3.C
VDD2
  Top 0.508: SOLD4.1 SOLD#4.1 SOLE4.1 SOLF4.1 | SOLG4.1 SOLG#4.1 SOLA4.1 SOLA#4.1 210.82,8.89 | 210.82,8.89 SOLB4.1 SOLC5.1 | SOLA3.1 SOLA#3.1 SOLB3.1 SOLC4.1 | DB4.C 210.82,24.13 210.82,8.89
  Bottom 0.508: DA3.C DA#3.C DB3.C DC4.C DC#4.C DD4.C DD#4.C DE4.C DF4.C DF#4.C DG4.C DG#4.C DA4.C DA#4.C DB4.C DC5.C | SOLF4.1 SOLF#4.1 SOLG4.1 | SOLA3.1 121.92,6.35 21.91,6.35 13.97,14.29 3.81,14.29 3.81,52.07 6.03,54.29 X1.11 | SOLC4.1 SOLC#4.1 SOLD4.1
(copper drawn outside any net)
  shapes: Top area x1